# Altium PCB Switch.PcbDoc
Units mil, origin at the board's own origin, x right, y up, seen from the top; angles counter-clockwise.
Board outline 3375.03 x 2130.03 mil, 4 copper layers (Top Layer, GND, PWR, Bottom Layer), stack 30.634 mil thick; 89 components, 94 nets, 442 pads, 0 vias.
Unrouted connection lines stored in the file: 230.
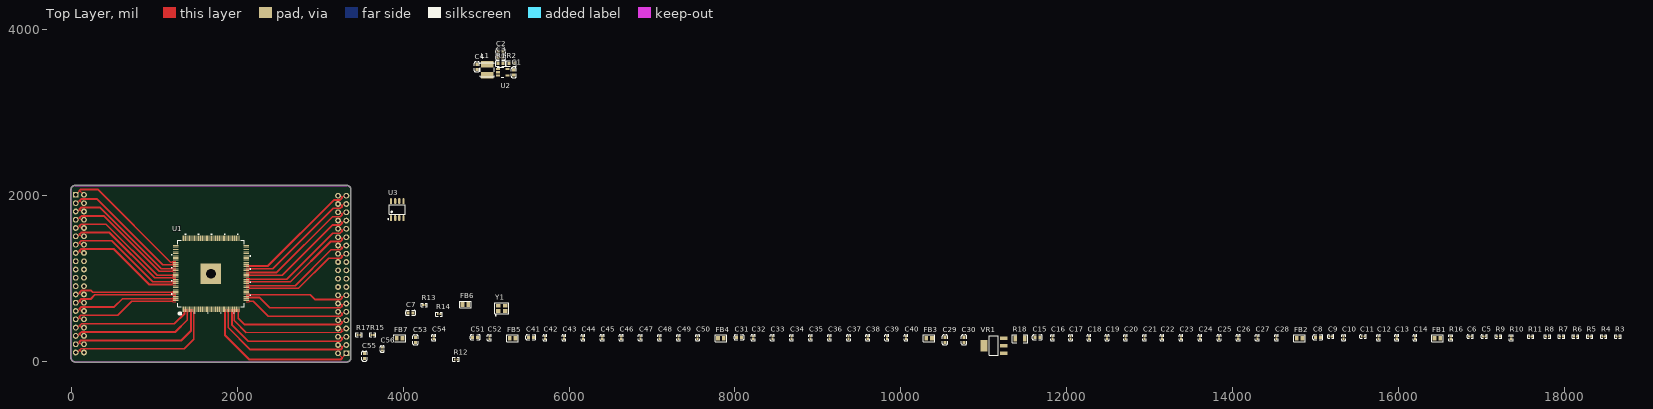
[diagram p0: Top Layer view]
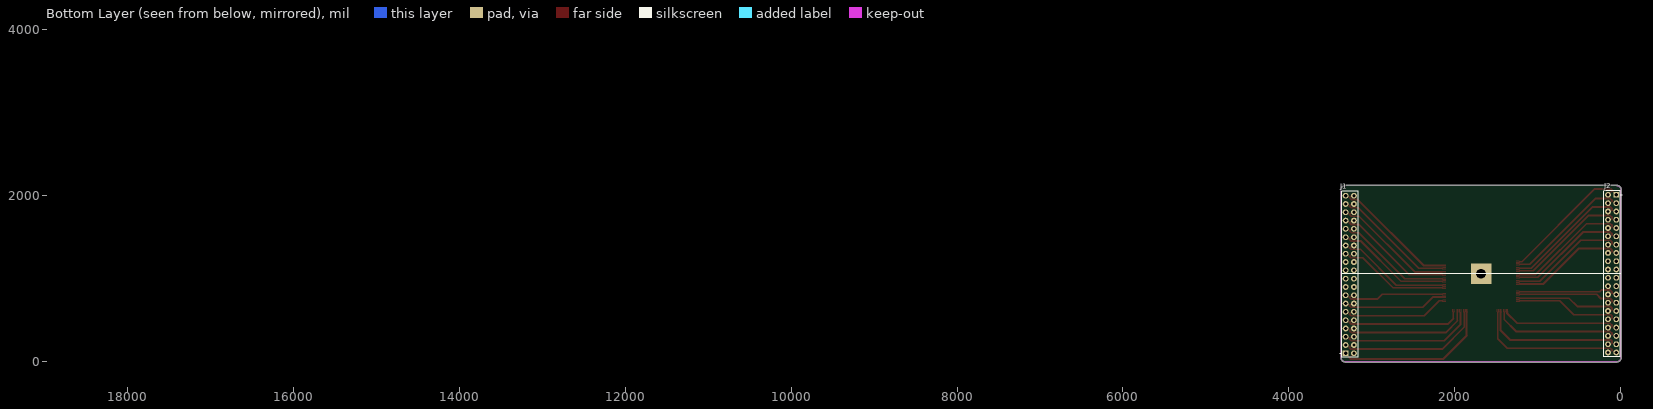
[diagram p1: Bottom Layer view, seen from below]
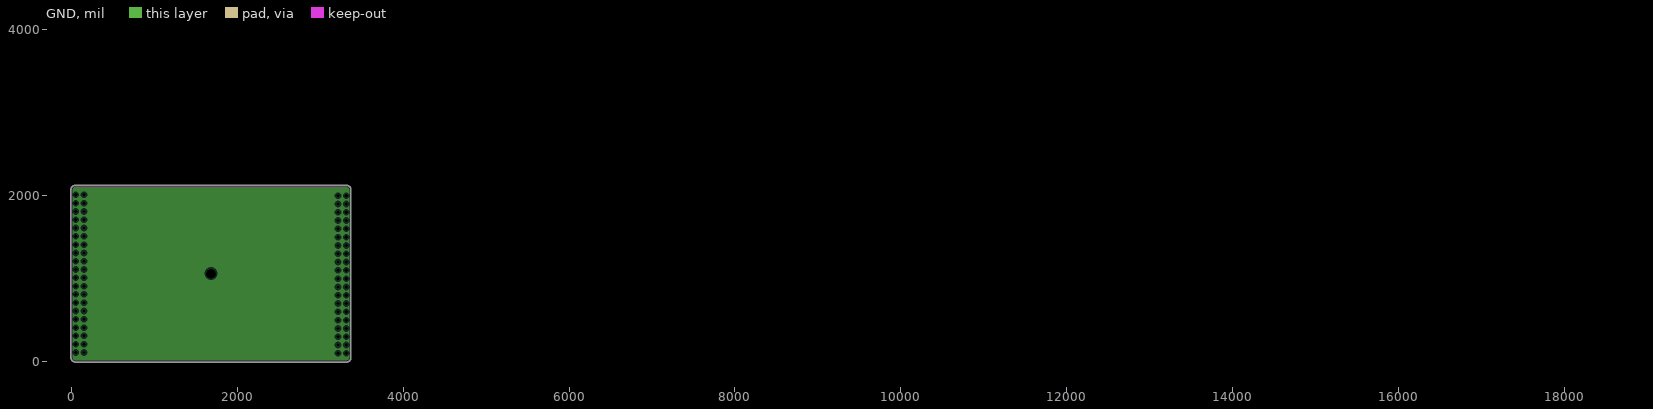
[diagram p2: GND, clearances drawn from the general rule]
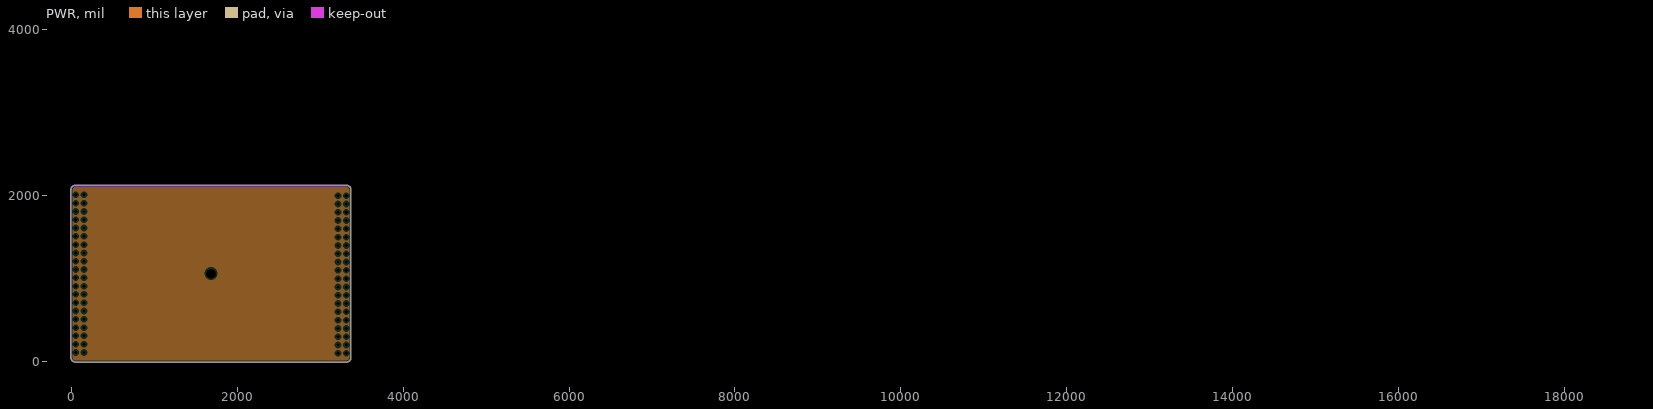
[diagram p3: PWR, clearances drawn from the general rule]

## Layer stack, top to bottom
Top Solder: solder mask 0.4, Solder Resist, Dk 3.5
Top Layer: signal copper 1.4
Dielectric 1: core 10, FR-4, Dk 4.2
GND: plane copper 1.417
Dielectric 3: prepreg 5, Dk 4.2
PWR: plane copper 1.417
Dielectric 2: core 10, Dk 4.2
Bottom Layer: signal copper 1.4
Bottom Solder: solder mask 0.4, Solder Resist, Dk 3.5

## Board outline
50,-2.51 cw(c50,50) -2.51,50 -2.51,2075 cw(c50,2075) 50,2127.51 3320,2127.51 cw(c3320,2075) 3372.52,2075 3372.52,50 cw(c3320,50) 3320,-2.51

## Design rules (kind name [scope] priority, off if disabled: settings)
Clearance [All] p1: gap=3.5 ignorepadtopadclearanceinfootprint=FALSE
DiffPairsRouting 100 [InDifferentialPairClass('All Differential Pairs')] p1: maxlimit=4 minlimit=4 mostfreqgap=4 toplayer_minwidth=4.96 toplayer_maxwidth=4.96 toplayer_prefwidth=4.96 bottomlayer_minwidth=4.96 bottomlayer_maxwidth=4.96 bottomlayer_prefwidth=4.96 maxuncoupledlength=500
PlaneClearance [All] p1: clearance=20
PlaneConnect [All] p1: planeconnectstyle=Relief reliefexpansion=20 reliefentries=4 reliefconductorwidth=10 reliefairgap=10
PolygonConnect [All] p1: connectstyle=Relief reliefconductorwidth=10 reliefentries=4 polygonreliefangle="90 Angle" airgapwidth=10
RoutingVias [All] p1: holewidth=28 width=50 viastyle="Through Hole" minholewidth=10 minwidth=20 maxholewidth=50 maxwidth=200
SolderMaskExpansion [All] p1: expansion=4
Width [All] p1: maxlimit=200 minlimit=4 preferedwidth=10
27 further rules are at their usual default settings.

## Classes and differential pairs
differential pair P7D: +P7D_P -P7D_N
differential pair P7C: +P7C_P -P7C_N
differential pair P7B: +P7B_P -P7B_N
differential pair P7A: +P7A_P -P7A_N
differential pair P6D: +P6D_P -P6D_N
differential pair P6C: +P6C_P -P6C_N
differential pair P6B: +P6B_P -P6B_N
differential pair P6A: +P6A_P -P6A_N
differential pair P5D: +P5D_P -P5D_N
differential pair P5C: +P5C_P -P5C_N
differential pair P5B: +P5B_P -P5B_N
differential pair P5A: +P5A_P -P5A_N
differential pair P4D: +P4D_P -P4D_N
differential pair P4C: +P4C_P -P4C_N
differential pair P4B: +P4B_P -P4B_N
differential pair P4A: +P4A_P -P4A_N
differential pair P3D: +P3D_P -P3D_N
differential pair P3C: +P3C_P -P3C_N
differential pair P3B: +P3B_P -P3B_N
differential pair P3A: +P3A_P -P3A_N
differential pair P2D: +P2D_P -P2D_N
differential pair P2C: +P2C_P -P2C_N
differential pair P2B: +P2B_P -P2B_N
differential pair P2A: +P2A_P -P2A_N
differential pair P1D: +P1D_P -P1D_N
differential pair P1C: +P1C_P -P1C_N
differential pair P1B: +P1B_P -P1B_N
differential pair P1A: +P1A_P -P1A_N
differential pair P0D: +P0D_P -P0D_N
differential pair P0C: +P0C_P -P0C_N
differential pair P0B: +P0B_P -P0B_N
differential pair P0A: +P0A_P -P0A_N

## Components (designator, comment, footprint, x,y, rotation, side; value= is the part's Value field where it differs from the comment)
C1 "4.7uF (475) 10% 16V" 0603_C 5335,3485 r270 top
C2 "22uF (226) 20% 6.3V" 0603_C 5175,3740 r180 top
C3 "22uF (226) 20% 6.3V" 0603_C 5175,3670 r180 top
C4 "22uF (226) 20% 6.3V" 0603_C 4890,3555 r90 top
C5 "33pF (330) 5% 50V" 0402_C 17030,305 r0 top
C6 "33pF (330) 5% 50V" 0402_C 16860,305 r0 top
C7 "1uF (105) 10% 50V" 0603_C 4090,590 r0 top
C8 "1uF (105) 10% 50V" 0603_C 15025,295 r0 top
C9 "100nF (104) 10% 16V" 0402_C 15180,305 r0 top
C10 "100nF (104) 10% 16V" 0402_C 15335,290 r90 top
C11 "100nF (104) 10% 16V" 0402_C 15570,305 r0 top
C12 "100nF (104) 10% 16V" 0402_C 15755,290 r90 top
C13 "100nF (104) 10% 16V" 0402_C 15975,290 r90 top
C14 "100nF (104) 10% 16V" 0402_C 16195,290 r90 top
C15 "1uF (105) 10% 50V" 0603_C 11645,295 r0 top
C16 "100nF (104) 10% 16V" 0402_C 11825,290 r90 top
C17 "100nF (104) 10% 16V" 0402_C 12045,290 r90 top
C18 "100nF (104) 10% 16V" 0402_C 12265,290 r90 top
C19 "100nF (104) 10% 16V" 0402_C 12485,290 r90 top
C20 "100nF (104) 10% 16V" 0402_C 12705,290 r90 top
C21 "100nF (104) 10% 16V" 0402_C 12935,290 r90 top
C22 "100nF (104) 10% 16V" 0402_C 13145,290 r90 top
C23 "100nF (104) 10% 16V" 0402_C 13375,290 r90 top
C24 "100nF (104) 10% 16V" 0402_C 13605,290 r90 top
C25 "100nF (104) 10% 16V" 0402_C 13835,290 r90 top
C26 "100nF (104) 10% 16V" 0402_C 14065,290 r90 top
C27 "100nF (104) 10% 16V" 0402_C 14295,290 r90 top
C28 "100nF (104) 10% 16V" 0402_C 14525,290 r90 top
C29 "1uF (105) 10% 50V" 0603_C 10530,265 r90 top
C30 "1uF (105) 10% 50V" 0603_C 10760,265 r90 top
C31 "1uF (105) 10% 50V" 0603_C 8050,295 r0 top
C32 "100nF (104) 10% 16V" 0402_C 8220,290 r90 top
C33 "100nF (104) 10% 16V" 0402_C 8450,290 r90 top
C34 "100nF (104) 10% 16V" 0402_C 8680,290 r90 top
C35 "100nF (104) 10% 16V" 0402_C 8910,290 r90 top
C36 "100nF (104) 10% 16V" 0402_C 9140,290 r90 top
C37 "100nF (104) 10% 16V" 0402_C 9370,290 r90 top
C38 "100nF (104) 10% 16V" 0402_C 9600,290 r90 top
C39 "100nF (104) 10% 16V" 0402_C 9830,290 r90 top
C40 "100nF (104) 10% 16V" 0402_C 10060,290 r90 top
C41 "1uF (105) 10% 50V" 0603_C 5540,295 r0 top
C42 "100nF (104) 10% 16V" 0402_C 5710,290 r90 top
C43 "100nF (104) 10% 16V" 0402_C 5940,290 r90 top
C44 "100nF (104) 10% 16V" 0402_C 6170,290 r90 top
C45 "100nF (104) 10% 16V" 0402_C 6400,290 r90 top
C46 "100nF (104) 10% 16V" 0402_C 6630,290 r90 top
C47 "100nF (104) 10% 16V" 0402_C 6860,290 r90 top
C48 "100nF (104) 10% 16V" 0402_C 7090,290 r90 top
C49 "100nF (104) 10% 16V" 0402_C 7320,290 r90 top
C50 "100nF (104) 10% 16V" 0402_C 7550,290 r90 top
C51 "1uF (105) 10% 50V" 0603_C 4870,295 r0 top
C52 "100nF (104) 10% 16V" 0402_C 5040,290 r90 top
C53 "1uF (105) 10% 50V" 0603_C 4150,265 r90 top
C54 "100nF (104) 10% 16V" 0402_C 4370,290 r90 top
C55 "1uF (105) 10% 50V" 0603_C 3535,70 r90 top
C56 "100nF (104) 10% 16V" 0402_C 3750,155 r90 top
FB1 "100Ω ±25% 100MHz" 0805_L 16465,285 r0 top
FB2 "100Ω ±25% 100MHz" 0805_L 14805,285 r0 top
FB3 "100Ω ±25% 100MHz" 0805_L 10340,285 r0 top
FB4 "100Ω ±25% 100MHz" 0805_L 7830,285 r0 top
FB5 "100Ω ±25% 100MHz" 0805_L 5320,285 r0 top
FB6 "100Ω ±25% 100MHz" 0805_L 4750,690 r0 top
FB7 "100Ω ±25% 100MHz" 0805_L 3960,285 r0 top
J1 "Header20x2_2.54_female" 2-534206-0 3317,102.5 r270 bottom locked
J2 "Header20x2_2.54_female" 2-534206-0 55,2012.5 r90 bottom locked
L1 "XAL4020-222MEB" XAL4020 5015,3520 r90 top value=2.2uH
R1 "66.5KΩ ±1%" 0603_R 5175,3595 r180 top
R2 "100KΩ (1003) ±1%" 0603_R 5305,3595 r180 top
R3 "4.7KΩ (4701) ±1%(NC)" 0402_R 18640,305 r0 top
R4 "4.7KΩ (4701) ±1%" 0402_R 18470,305 r0 top
R5 "4.7KΩ (4701) ±1%" 0402_R 18300,305 r0 top
R6 "4.7KΩ (4701) ±1%" 0402_R 18130,305 r0 top
R7 "4.7KΩ (4701) ±1%" 0402_R 17960,305 r0 top
R8 "4.7KΩ (4701) ±1%" 0402_R 17790,305 r0 top
R9 "4.7KΩ (4701) ±1%" 0402_R 17200,305 r0 top
R10 "4.7KΩ (4701) ±1%" 0402_R 17355,290 r90 top
R11 "4.7KΩ (4701) ±1%" 0402_R 17590,305 r0 top
R12 "100KΩ (1003) ±1%" 0402_R 4640,30 r0 top
R13 "4.7KΩ (4701) ±1%" 0402_R 4255,685 r0 top
R14 "4.7KΩ (4701) ±1%" 0402_R 4435,575 r0 top
R15 "4.7KΩ (4701) ±1%" 0402_R 3635,325 r0 top
R16 "1KΩ (1001) ±1%" 0402_R 16625,290 r90 top
R17 "2.49KΩ ±1%" 0402_R 3470,325 r0 top
R18 "0Ω (0R0) ±1%(NC)" 1206_R 11435,280 r0 top
U1 "RTL8370M" PLQP0176LA-B-M 1685,1062.5 r90 top locked
U2 "TLV62569DBVR" DBV0005A_M 5200,3490 r0 top value=N/A
U3 "M24C02-WMN6TP(NC)" SOIC-8_150mil 3930,1835 r0 top
VR1 "AMS1117-3.3" SOT-223 11120,195 r0 top
Y1 "25MHZ 12PF 10PPM" SMD-3225_4P 5190,645 r0 top

## Footprints (in the part's own frame and the unit in brackets; to place one, negate y for a bottom-side part, rotate by r counter-clockwise, add the part's x,y. Pads: shape width x height; smd on the part's side, far side on the other; paste and mask are expansions set on the pad)
2-534206-0 [mil]
  rect 70x70 hole 40.16: 1(0,0)
  round 70 hole 40.16: 2(0,100) 3(-100,0) 4(-100,100) 5(-200,0) 6(-200,100) 7(-300,0) 8(-300,100) 9(-400,0) 10(-400,100) 11(-500,0) 12(-500,100) 13(-600,0) 14(-600,100) 15(-700,0) 16(-700,100) 17(-800,0) 18(-800,100) 19(-900,0) 20(-900,100) 21(-1000,0) 22(-1000,100) 23(-1100,0) 24(-1100,100) 25(-1200,0) 26(-1200,100) 27(-1300,0) 28(-1300,100) 29(-1400,0) 30(-1400,100) 31(-1500,0) 32(-1500,100) 33(-1600,0) 34(-1600,100) 35(-1700,0) 36(-1700,100) 37(-1800,0) 38(-1800,100) 39(-1900,0) 40(-1900,100)
  silkscreen extent -1952,-67 48,152, body extent -1952,-46 48,152, height 320
0402_C [mm]
  rect 0.6x0.65 smd mask+0.051: 1(-0.425,0) 2(0.425,0)
  silkscreen extent -0.97,-0.58 0.97,0.58, body extent -0.48,-0.3 0.52,0.3, height 0.2
0402_R [mm]
  rect 0.6x0.65 smd mask+0.051: 1(-0.425,0) 2(0.425,0)
  silkscreen extent -0.97,-0.58 0.97,0.58, body extent -0.57,-0.27 0.58,0.28, height 0.41
0603_C [mm]
  rect 0.93x0.98 smd: 1(-0.77,0) 2(0.77,0)
  silkscreen extent -1.53,-0.79 1.54,0.79, body extent -0.8,-0.4 0.8,0.4, height 0.3
0603_R [mm]
  rect 0.93x0.98 smd: 1(-0.77,0) 2(0.77,0)
  silkscreen extent -1.53,-0.79 1.54,0.79, body extent -0.85,-0.4 0.85,0.4, height 0.56
0805_L [mm]
  rect 1.16x1.47 smd: 1(-0.89,0) 2(0.89,0)
  silkscreen extent -1.77,-1.04 1.77,1.03, body extent -1.02,-0.64 1.03,0.64, height 0.6
1206_R [mm]
  rect 1.13x1.8 smd: 1(-1.49,0) 2(1.49,0)
  silkscreen extent -2.36,-1.2 2.35,1.2, body extent -1.7,-0.86 1.65,0.87, height 0.85
DBV0005A_M [mm]
  rect 1.2x0.65 smd paste+0 mask+0.051: 1(-1.475,0.95) 2(-1.475,0) 3(-1.475,-0.95) 4(1.475,-0.95) 5(1.475,0.95)
  silkscreen extent -1.63,-1.55 0.38,1.55, body extent -1.4,-1.45 1.4,1.45, height 1.2
PLQP0176LA-B-M [mil]
  rect 66x9 smd paste+0 mask+0: 1(-426,338.58) 2(-426,322.83) 3(-426,307.09) 4(-426,291.34) 5(-426,275.59) 6(-426,259.84) 7(-426,244.09) 8(-426,228.35) 9(-426,212.6) 10(-426,196.85) 11(-426,181.1) 12(-426,165.35) 13(-426,149.61) 14(-426,133.86) 15(-426,118.11) 16(-426,102.36) 17(-426,86.61) 18(-426,70.87) 19(-426,55.12) 20(-426,39.37) 21(-426,23.62) 22(-426,7.87) 23(-426,-7.87) 24(-426,-23.62) 25(-426,-39.37) 26(-426,-55.12) 27(-426,-70.87) 28(-426,-86.61) 29(-426,-102.36) 30(-426,-118.11) 31(-426,-133.86) 32(-426,-149.61) 33(-426,-165.35) 34(-426,-181.1) 35(-426,-196.85) 36(-426,-212.6) 37(-426,-228.35) 38(-426,-244.09) 39(-426,-259.84) 40(-426,-275.59) 41(-426,-291.34) 42(-426,-307.09) 43(-426,-322.83) 44(-426,-338.58) 89(426,-338.58) 90(426,-322.83) 91(426,-307.09) 92(426,-291.34) 93(426,-275.59) 94(426,-259.84) 95(426,-244.09) 96(426,-228.35) 97(426,-212.6) 98(426,-196.85) 99(426,-181.1) 100(426,-165.35) 101(426,-149.61) 102(426,-133.86) 103(426,-118.11) 104(426,-102.36) 105(426,-86.61) 106(426,-70.87) 107(426,-55.12) 108(426,-39.37) 109(426,-23.62) 110(426,-7.87) 111(426,7.87) 112(426,23.62) 113(426,39.37) 114(426,55.12) 115(426,70.87) 116(426,86.61) 117(426,102.36) 118(426,118.11) 119(426,133.86) 120(426,149.61) 121(426,165.35) 122(426,181.1) 123(426,196.85) 124(426,212.6) 125(426,228.35) 126(426,244.09) 127(426,259.84) 128(426,275.59) 129(426,291.34) 130(426,307.09) 131(426,322.83) 132(426,338.58)
  rect 9x66 smd paste+0 mask+0: 45(-338.58,-426) 46(-322.83,-426) 47(-307.09,-426) 48(-291.34,-426) 49(-275.59,-426) 50(-259.84,-426) 51(-244.09,-426) 52(-228.35,-426) 53(-212.6,-426) 54(-196.85,-426) 55(-181.1,-426) 56(-165.35,-426) 57(-149.61,-426) 58(-133.86,-426) 59(-118.11,-426) 60(-102.36,-426) 61(-86.61,-426) 62(-70.87,-426) 63(-55.12,-426) 64(-39.37,-426) 65(-23.62,-426) 66(-7.87,-426) 67(7.87,-426) 68(23.62,-426) 69(39.37,-426) 70(55.12,-426) 71(70.87,-426) 72(86.61,-426) 73(102.36,-426) 74(118.11,-426) 75(133.86,-426) 76(149.61,-426) 77(165.35,-426) 78(181.1,-426) 79(196.85,-426) 80(212.6,-426) 81(228.35,-426) 82(244.09,-426) 83(259.84,-426) 84(275.59,-426) 85(291.34,-426) 86(307.09,-426) 87(322.83,-426) 88(338.58,-426) 133(338.58,426) 134(322.83,426) 135(307.09,426) 136(291.34,426) 137(275.59,426) 138(259.84,426) 139(244.09,426) 140(228.35,426) 141(212.6,426) 142(196.85,426) 143(181.1,426) 144(165.35,426) 145(149.61,426) 146(133.86,426) 147(118.11,426) 148(102.36,426) 149(86.61,426) 150(70.87,426) 151(55.12,426) 152(39.37,426) 153(23.62,426) 154(7.87,426) 155(-7.87,426) 156(-23.62,426) 157(-39.37,426) 158(-55.12,426) 159(-70.87,426) 160(-86.61,426) 161(-102.36,426) 162(-118.11,426) 163(-133.86,426) 164(-149.61,426) 165(-165.35,426) 166(-181.1,426) 167(-196.85,426) 168(-212.6,426) 169(-228.35,426) 170(-244.09,426) 171(-259.84,426) 172(-275.59,426) 173(-291.34,426) 174(-307.09,426) 175(-322.83,426) 176(-338.58,426)
  rect 248.03x248.03 hole 118.11: 177(0,0)
  silkscreen extent -491,-479 479,479, body extent -437,-437 437,437, height 67
SMD-3225_4P [mm]
  rect 1.4x1.15 smd: 1(-1.1,-0.8) 2(1.1,-0.8) 3(1.1,0.8) 4(-1.1,0.8)
  silkscreen extent -2.1,-2.35 2.1,1.7, body extent -1.6,-1.25 1.6,1.25, height 0.61
SOIC-8_150mil [mm]
  oval 0.7x1.8 smd: 1(-1.905,-2.6) 2(-0.635,-2.6) 3(0.635,-2.6) 4(1.905,-2.6) 5(1.905,2.6) 6(0.635,2.6) 7(-0.635,2.6) 8(-1.905,2.6)
  silkscreen extent -2.9,-3.05 2.4,1.4
SOT-223 [mm]
  rect 2.2x1 smd: 1(3,-2.3) 2(3,0) 3(3,2.3)
  rect 2.2x3.5 smd: 2(-3,0)
  silkscreen extent -1.4,-3 1.4,3, body extent -3.49,-3.24 3.49,3.24, height 1.64
XAL4020 [mm]
  rect 2x3.708 smd: 1(-1.7,0) 2(1.7,0)
  silkscreen extent -2.15,-2.15 2.15,2.15, body extent -2.45,-2.15 2.45,2.15, height 2.41

## Part data
C1: library part "0603 4.7uF (475) 10% 16V", "贴片电容", Package=0603, SuppliersPartNumber=C19666, ComponentLink1Description=供应商链接, ComponentLink1URL=http://www.szlcsc.com/product/details_20375.html, Supplier=LC
C2 C3 C4: library part "0603 22uF (226) 20% 6.3V", "贴片电容", Package=0603, SuppliersPartNumber=C59461, ComponentLink1Description=供应商链接, ComponentLink1URL=http://www.szlcsc.com/product/details_60514.html, Supplier=LC
C5 C6: library part "0402 33pF (330) 5% 50V", "贴片电容", Package=0402, SuppliersPartNumber=C1562, ComponentLink1Description=供应商链接, ComponentLink1URL=http://www.szlcsc.com/product/details_1914.html, Supplier=LC
C7 C8 C15 C29 C30 C31 C41 C51 C53 C55: library part "0603 1uF (105) 10% 50V", "贴片电容", Package=0603, SuppliersPartNumber=C15849, ComponentLink1Description=供应商链接, ComponentLink1URL=http://www.szlcsc.com/product/details_16531.html, Supplier=LC
C9 C10 C11 C12 C13 C14 C16 C17 C18 C19 C20 C21 C22 C23 C24 C25 C26 C27 C28 C32 C33 C34 C35 C36 C37 C38 C39 C40 C42 C43 C44 C45 C46 C47 C48 C49 C50 C52 C54 C56: library part "0402 100nF (104) 10% 16V", "贴片电容", Package=0402, SuppliersPartNumber=C1525, ComponentLink1Description=供应商链接, ComponentLink1URL=http://www.szlcsc.com/product/details_1877.html, Supplier=LC
FB1 FB2 FB3 FB4 FB5 FB6 FB7: library part "0805 100Ω 25% 100MHz", "贴片磁珠", Package=0805, SuppliersPartNumber=C1015, ComponentLink1Description=供应商链接, ComponentLink1URL=http://www.szlcsc.com/product/details_1367.html, Supplier=LC
L1: Manufacturer Name=Coilcraft, Manufacturer Part Number=XAL4020-222MEB, PackageReference=XAL4020-222MEB
R1 R2: library part "0603 100KΩ (1003) 1%", "贴片电阻", Package=0603, SuppliersPartNumber=C25803, ComponentLink1Description=供应商链接, Supplier=LC
  R2: ComponentLink1URL=http://www.szlcsc.com/product/details_26546.html
R3 R4 R5 R6 R7 R8 R9 R10 R11 R13 R14 R15: library part "0402 4.7KΩ (4701) 1%", "贴片电阻", Package=0402, SuppliersPartNumber=C25900, ComponentLink1Description=供应商链接, ComponentLink1URL=http://www.szlcsc.com/product/details_26643.html, Supplier=LC
R12: library part "0402 100KΩ (1003) 1%", "贴片电阻", Package=0402, SuppliersPartNumber=C25741, ComponentLink1Description=供应商链接, ComponentLink1URL=http://www.szlcsc.com/product/details_26484.html, Supplier=LC
R16: library part "0402 1KΩ (1001) 1%", "贴片电阻", Package=0402, SuppliersPartNumber=C11702, ComponentLink1Description=供应商链接, ComponentLink1URL=http://www.szlcsc.com/product/details_12256.html, Supplier=LC
R17: library part "0402 2KΩ (2001) 1%", "贴片电阻", Package=0402, SuppliersPartNumber=C4109, ComponentLink1Description=供应商链接, ComponentLink1URL=http://www.szlcsc.com/product/details_4516.html, Supplier=LC
R18: library part "1206 0Ω (0R0) 1%", "贴片电阻", Package=1206, SuppliersPartNumber=C17888, ComponentLink1Description=供应商链接, ComponentLink1URL=http://www.szlcsc.com/product/details_18576.html, Supplier=LC
U2: Manufacturer Name="Texas Instruments", Manufacturer Part Number=TLV62569DBVR, PackageReference=TLV62569DBVR
U3: library part M24C02-WMN6TP_[C7562], "EEPROM", Package=SOIC-8_150mil, SuppliersPartNumber=C7562, ComponentLink1Description=供应商链接, ComponentLink1URL=http://www.szlcsc.com/product/details_8039.html, Supplier=LC
VR1: library part "SOT-223 AMS1117-3.3", "低压差线性稳压(LDO)", Package=SOT-223, SuppliersPartNumber=C6186, ComponentLink1Description=供应商链接, ComponentLink1URL=http://www.szlcsc.com/product/details_6652.html, Supplier=LC
Y1: library part "SMD-3225_4P  25MHZ 12PF 10PPM", "贴片晶振", Package=SMD-3225_4P, SuppliersPartNumber=C9006, ComponentLink1Description=供应商链接, ComponentLink1URL=http://www.szlcsc.com/product/details_9526.html, Supplier=LC

## Nets (pads, with @x,y where several pads share a name; then routed paths per layer and width w, separated by ;. In a path a pad name is that pad's centre, name@x,y a point inside that pad or via, vN(x,y) a via of type N, cw(c..) or ccw(c..) an arc to the next point about the centre after c; other vN are vias at no path point)
1V: C2.2 C3.2 C4.2 FB3.1 FB4.1 FB5.1 FB6.1 FB7.1 L1.2 R1.2
3V3: C30.2 FB1.1 FB2.1 R4.1 R5.1 R8.1 R9.1 R12.2 R13.2 R14.1 R15.1 R18.2 U3.8 VR1.2
AVDDH: C15.2 C16.2 C17.2 C18.2 C19.2 C20.2 C21.2 C22.2 C23.2 C24.2 C25.2 C26.2 C27.2 C28.2 FB2.2 U1.1 U1.11 U1.20 U1.32 U1.42 U1.54 U1.64 U1.74 U1.137 U1.144 U1.154 U1.167
AVDDL: C31.2 C32.2 C33.2 C34.2 C35.2 C36.2 C37.2 C38.2 C39.2 C40.2 FB3.2 U1.6 U1.17 U1.37 U1.47 U1.59 U1.69 U1.149 U1.159 U1.172
DIS_8051: R5.2 U1.125
DISAUTOLOAD: R3.2 R4.2 U1.126
DVDDIO: C8.2 C9.2 C10.2 C11.2 C12.2 C13.2 C14.2 FB1.2 U1.21 U1.88 U1.104 U1.105 U1.132 U1.140
DVDDL: C41.2 C42.2 C43.2 C44.2 C45.2 C46.2 C47.2 C48.2 C49.2 C50.2 FB4.2 U1.22 U1.26 U1.29 U1.30 U1.103 U1.106 U1.133 U1.136
DVDDL1: C51.2 C52.2 FB5.2
EN_FLASH: R6.2 U1.124
EN_PHY: R7.2 U1.131
GND: C1.1 C2.1 C3.1 C4.1 C5.1 C6.1 C7.1 C8.1 C9.1 C10.1 C11.1 C12.1 C13.1 C14.1 C15.1 C16.1 C17.1 C18.1 C19.1 C20.1 C21.1 C22.1 C23.1 C24.1 C25.1 C26.1 C27.1 C28.1 C29.1 C30.1 C31.1 C32.1 C33.1 C34.1 C35.1 C36.1 C37.1 C38.1 C39.1 C40.1 C41.1 C42.1 C43.1 C44.1 C45.1 C46.1 C47.1 C48.1 C49.1 C50.1 C51.1 C52.1 C53.1 C54.1 C55.1 C56.1 J1.17 J1.19 J1.21 J1.23 J2.17 J2.19 J2.21 J2.23 R2.1 R3.1 R6.1 R7.1 R10.1 R11.1 R16.1 R17.1 U1.12 U1.15 U1.23 U1.28 U1.31 U1.53 U1.166 U1.177 U2.2 U3.1 U3.2 U3.3 U3.4 VR1.1
INT: U1.24
NetC5_2: C5.2 U1.138 Y1.3
NetC6_2: C6.2 U1.139 Y1.1
NetL1_1: L1.1 U2.3
NetR1_1: R1.1 R2.2 U2.5
NetR9_2: R9.2 U1.123
NetR10_2: R10.2 U1.120
NetR11_2: R11.2 U1.91
NetR13_1: R13.1 U1.142 U3.6
NetR14_2: R14.2 U1.143 U3.5
NetR15_2: R15.2 U3.7
NetR16_2: R16.2 U1.13
NetR17_2: R17.2 U1.16
nRST: C7.2 R12.1 U1.141
P0A_N: J2.2 U1.146 | length 1588.1
  Top Layer w4.96: J2.2 109.48,2058.02 109.48,2065 118.48,2074 318.04,2074 1192.29,1199.75 1220.13,1199.75 1223.52,1196.36 U1.146
P0A_P: J2.1 U1.145 | length 1603
  Top Layer w4.96: J2.1 100.52,2058.02 100.52,2068.71 114.77,2082.96 321.75,2082.96 327.71,2077 1196,1208.71 1220.13,1208.71 1223.52,1212.11 U1.145
P0B_N: J2.4 U1.148 | length 1550.5
  Top Layer w4.96: J2.4 129.98,1912.5 109.48,1933 109.48,1942.48 128,1961 306.33,1961 1099.07,1168.26 1220.13,1168.26 1223.52,1164.86 U1.148
P0B_P: J2.3 U1.147 | length 1565.3
  Top Layer w4.96: J2.3 80.02,1912.5 100.52,1933 100.52,1946.19 121.66,1967.34 124.29,1969.96 310.04,1969.96 1102.78,1177.22 1220.13,1177.22 1223.52,1180.61 U1.147
P0C_N: J2.6 U1.151 | length 1528.2
  Top Layer w4.96: J2.6 122.98,1812.5 109.48,1826 109.48,1839 128.48,1858 343.33,1858 1080.32,1121.01 1220.13,1121.01 1223.52,1117.62 U1.151
P0C_P: J2.5 U1.150 | length 1543
  Top Layer w4.96: J2.5 87.02,1812.5 100.52,1826 100.52,1842.71 124.77,1866.96 347.04,1866.96 1084.03,1129.97 1220.13,1129.97 1223.52,1133.37 U1.150
P0D_N: J2.8 U1.153 | length 1498.7
  Top Layer w4.96: J2.8 120.98,1712.5 109.48,1724 109.48,1736.48 130,1757 391.33,1757 1058.81,1089.52 1220.13,1089.52 1223.52,1086.12 U1.153
P0D_P: J2.7 U1.152 | length 1513.5
  Top Layer w4.96: J2.7 89.02,1712.5 100.52,1724 100.52,1740.19 123.66,1763.34 126.29,1765.96 395.04,1765.96 1062.52,1098.48 1220.13,1098.48 1223.52,1101.87 U1.152
P1A_N: J2.10 U1.156 | length 1478.2
  Top Layer w4.96: J2.10 123.98,1612.5 109.48,1627 109.48,1640.48 127,1658 416,1658 1031.73,1042.27 1220.13,1042.27 1223.52,1038.88 U1.156
P1A_P: J2.9 U1.155 | length 1493.1
  Top Layer w4.96: J2.9 86.02,1612.5 100.52,1627 100.52,1644.19 123.29,1666.96 419.71,1666.96 1035.44,1051.23 1220.13,1051.23 1223.52,1054.63 U1.155
P1B_N: J2.12 U1.158 | length 1448.4
  Top Layer w4.96: J2.12 123.98,1512.5 109.48,1527 109.48,1539.48 127,1557 456.33,1557 1002.55,1010.78 1220.13,1010.78 1223.52,1007.38 U1.158
P1B_P: J2.11 U1.157 | length 1463.3
  Top Layer w4.96: J2.11 86.02,1512.5 100.52,1527 100.52,1543.19 120.66,1563.34 123.29,1565.96 460.04,1565.96 1006.26,1019.74 1220.13,1019.74 1223.52,1023.13 U1.157
P1C_N: J2.14 U1.161 | length 1429.8
  Top Layer w4.96: J2.14 120.98,1412.5 109.48,1424 109.48,1440.48 127,1458 485.33,1458 979.8,963.53 1220.13,963.53 1223.52,960.14 U1.161
P1C_P: J2.13 U1.160 | length 1444.6
  Top Layer w4.96: J2.13 89.02,1412.5 100.52,1424 100.52,1444.19 123.29,1466.96 489.04,1466.96 983.51,972.49 1220.13,972.49 1223.52,975.89 U1.160
P1D_N: J2.16 U1.163 | length 1398.5
  Top Layer w4.96: J2.16 124.98,1312.5 109.48,1328 109.48,1339.48 128,1358 510.33,1358 936.29,932.04 1220.13,932.04 1223.52,928.64 U1.163
P1D_P: J2.15 U1.162 | length 1413.3
  Top Layer w4.96: J2.15 85.02,1312.5 100.52,1328 100.52,1343.19 124.29,1366.96 514.04,1366.96 940,941 1220.13,941 1223.52,944.39 U1.162
P2A_N: J2.26 U1.169 | length 1230.2
  Top Layer w4.96: J2.26 119.98,812.5 109.48,823 109.48,835.48 131,857 235,857 254.45,837.55 1220.13,837.55 1223.52,834.15 U1.169
P2A_P: J2.25 U1.168 | length 1245.1
  Top Layer w4.96: J2.25 90.02,812.5 100.52,823 100.52,839.19 127.29,865.96 238.71,865.96 258.16,846.51 1220.13,846.51 1223.52,849.9 U1.168
P2B_N: J2.28 U1.171 | length 1241.6
  Top Layer w4.96: J2.28 123.98,712.5 109.48,727 109.48,738 128.48,757 240,757 289.05,806.05 1220.13,806.05 1223.52,802.66 U1.171
P2B_P: J2.27 U1.170 | length 1256.5
  Top Layer w4.96: J2.27 86.02,712.5 100.52,727 100.52,741.71 124.77,765.96 236.29,765.96 285.34,815.01 1220.13,815.01 1223.52,818.41 U1.170
P2C_N: J2.30 U1.174 | length 1264.4
  Top Layer w4.96: J2.30 123.98,612.5 109.48,627 109.48,639.48 128,658 522.67,658 623.48,758.81 1220.13,758.81 1223.52,755.41 U1.174
P2C_P: J2.29 U1.173 | length 1279.2
  Top Layer w4.96: J2.29 86.02,612.5 100.52,627 100.52,643.19 124.29,666.96 518.96,666.96 619.77,767.77 1220.13,767.77 1223.52,771.16 U1.173
P2D_N: J2.32 U1.176 | length 1298.9
  Top Layer w4.96: J2.32 121.98,512.5 109.48,525 109.48,548 120.48,559 568,559 736.31,727.31 1220.13,727.31 1223.52,723.92 U1.176
P2D_P: J2.31 U1.175 | length 1313.7
  Top Layer w4.96: J2.31 88.02,512.5 100.52,525 100.52,551.71 116.77,567.96 564.29,567.96 732.6,736.27 1220.13,736.27 1223.52,739.67 U1.175
P3A_N: J2.34 U1.3 | length 1442.6
  Top Layer w4.96: J2.34 122.98,412.5 109.48,426 109.48,436.48 130,457 1249.23,457 1374.52,582.29 1374.52,597.63 1377.91,601.02 U1.3
P3A_P: J2.33 U1.2 | length 1442.6
  Top Layer w4.96: J2.33 87.02,412.5 100.52,426 100.52,440.19 126.29,465.96 1245.52,465.96 1365.56,586 1365.56,597.63 1362.17,601.02 U1.2
P3B_N: J2.36 U1.5 | length 1560.6
  Top Layer w4.96: J2.36 124.98,312.5 109.48,328 109.48,339.48 129,359 1258.67,359 1406.02,506.34 1406.02,597.63 1409.41,601.02 U1.5
P3B_P: J2.35 U1.4 | length 1560.6
  Top Layer w4.96: J2.35 85.02,312.5 100.52,328 100.52,343.19 125.29,367.96 1254.96,367.96 1397.06,510.06 1397.06,597.63 1393.66,601.02 U1.4
P3C_N: J2.38 U1.8 | length 1728.5
  Top Layer w4.96: J2.38 123.98,212.5 109.48,227 109.48,244 122.48,257 1333.67,257 1453.26,376.59 1453.26,597.63 1456.65,601.02 U1.8
P3C_P: J2.37 U1.7 | length 1728.5
  Top Layer w4.96: J2.37 86.02,212.5 100.52,227 100.52,247.71 118.77,265.96 1329.96,265.96 1444.3,380.3 1444.3,597.63 1440.91,601.02 U1.7
P3D_N: J2.40 U1.10 | length 1856.5
  Top Layer w4.96: J2.40 131.98,112.5 109.48,135 109.48,141.48 125,157 1369.67,157 1484.76,272.08 1484.76,597.63 1488.15,601.02 U1.10
P3D_P: J2.39 U1.9 | length 1856.5
  Top Layer w4.96: J2.39 78.02,112.5 100.52,135 100.52,145.19 121.29,165.96 1365.96,165.96 1475.8,275.8 1475.8,597.63 1472.4,601.02 U1.9
P4A_N: J1.2 U1.34 | length 1911.5
  Top Layer w4.96: U1.34 1866.1,601.02 1862.71,597.63 1862.71,320.29 2146,37 3249.52,37 3262.52,50 3262.52,56.98 J1.2
P4A_P: J1.1 U1.33 | length 1941.2
  Top Layer w4.96: U1.33 1850.35,601.02 1853.75,597.63 1853.75,316.58 2142.29,28.04 3253.23,28.04 3271.48,46.29 3271.48,56.98 J1.1
P4B_N: J1.4 U1.36 | length 1770.9
  Top Layer w4.96: U1.36 1897.6,601.02 1894.2,597.63 1894.2,418 2155.2,157 3252,157 3262.52,167.52 3262.52,185 3245.02,202.5 J1.4
P4B_P: J1.3 U1.35 | length 1800.6
  Top Layer w4.96: U1.35 1881.85,601.02 1885.24,597.63 1885.24,414.29 2151.49,148.04 2155.2,148.04 2283.29,148.04 3255.71,148.04 3271.48,163.81 3271.48,185 3288.98,202.5 J1.3
P4C_N: J1.6 U1.39 | length 1661.8
  Top Layer w4.96: U1.39 1944.84,601.02 1941.45,597.63 1941.45,449.55 2134,257 3245.52,257 3262.52,274 3262.52,288 3248.02,302.5 J1.6
P4C_P: J1.5 U1.38 | length 1691.4
  Top Layer w4.96: U1.38 1929.09,601.02 1932.49,597.63 1932.49,445.84 2130.29,248.04 3249.23,248.04 3271.48,270.29 3271.48,288 3285.98,302.5 J1.5
P4D_N: J1.8 U1.41 | length 1560.5
  Top Layer w4.96: U1.41 1976.34,601.02 1972.94,597.63 1972.94,496 2110.94,358 3247,358 3262.52,373.52 3262.52,387 3247.02,402.5 J1.8
P4D_P: J1.7 U1.40 | length 1590.2
  Top Layer w4.96: U1.40 1960.59,601.02 1963.98,597.63 1963.98,492.29 2107.23,349.04 3250.71,349.04 3271.48,369.81 3271.48,387 3286.98,402.5 J1.7
P5A_N: J1.10 U1.44 | length 1453.4
  Top Layer w4.96: U1.44 2023.58,601.02 2020.19,597.63 2020.19,524.81 2088,457 3244,457 3262.52,475.52 3262.52,485 3245.02,502.5 J1.10
P5A_P: J1.9 U1.43 | length 1483.1
  Top Layer w4.96: U1.43 2007.83,601.02 2011.23,597.63 2011.23,521.1 2084.29,448.04 3247.71,448.04 3271.48,471.81 3271.48,485 3288.98,502.5 J1.9
P5B_N: J1.12 U1.46 | length 1299.8
  Top Layer w4.96: U1.46 2146.48,739.67 2149.87,736.27 2193.73,736.27 2373,557 3248.52,557 3262.52,571 3262.52,585 3245.02,602.5 J1.12
P5B_P: J1.11 U1.45 | length 1314.6
  Top Layer w4.96: U1.45 2146.48,723.92 2149.87,727.31 2190.02,727.31 2369.29,548.04 3252.23,548.04 3271.48,567.29 3271.48,585 3288.98,602.5 J1.11
P5C_N: J1.14 U1.49 | length 1276.8
  Top Layer w4.96: U1.49 2146.48,786.91 2149.87,783.52 2268.16,783.52 2393.67,658 3247,658 3262.52,673.52 3262.52,687 3247.02,702.5 J1.14
P5C_P: J1.13 U1.48 | length 1291.6
  Top Layer w4.96: U1.48 2146.48,771.16 2149.87,774.56 2264.44,774.56 2389.96,649.04 3250.71,649.04 3271.48,669.81 3271.48,687 3286.98,702.5 J1.13
P5D_N: J1.16 U1.51 | length 1247.3
  Top Layer w4.96: U1.51 2146.48,818.41 2149.87,815.01 2879.71,815.01 2936.76,757.96 3246.96,757.96 3262.52,773.52 3262.52,785 3245.02,802.5 J1.16
P5D_P: J1.15 U1.50 | length 1262.1
  Top Layer w4.96: U1.50 2146.48,802.66 2149.87,806.05 2876,806.05 2933.01,749.04 3250.71,749.04 3271.48,769.81 3271.48,785 3288.98,802.5 J1.15
P6A_N: J1.26 U1.56 | length 1373
  Top Layer w4.96: U1.56 2146.48,897.15 2149.87,893.75 2741.75,893.75 3105,1257 3249.52,1257 3262.52,1270 3262.52,1279 3239.02,1302.5 J1.26
P6A_P: J1.25 U1.55 | length 1387.9
  Top Layer w4.96: U1.55 2146.48,881.4 2149.87,884.79 2745.46,884.79 3108.71,1248.04 3253.23,1248.04 3271.48,1266.29 3271.48,1279 3294.98,1302.5 J1.25
P6B_N: J1.28 U1.58 | length 1400.5
  Top Layer w4.96: U1.58 2146.48,928.64 2149.87,925.25 2700.25,925.25 3132,1357 3244,1357 3262.52,1375.52 3262.52,1383 3243.02,1402.5 J1.28
P6B_P: J1.27 U1.57 | length 1415.4
  Top Layer w4.96: U1.57 2146.48,912.89 2149.87,916.29 2703.96,916.29 3135.71,1348.04 3247.71,1348.04 3271.48,1371.81 3271.48,1383 3290.98,1402.5 J1.27
P6C_N: J1.30 U1.61 | length 1426.2
  Top Layer w4.96: U1.61 2146.48,975.89 2149.87,972.49 2645.49,972.49 3130,1457 3246.52,1457 3262.52,1473 3262.52,1487 3247.02,1502.5 J1.30
P6C_P: J1.29 U1.60 | length 1441
  Top Layer w4.96: U1.60 2146.48,960.14 2149.87,963.53 2649.2,963.53 3133.71,1448.04 3250.23,1448.04 3271.48,1469.29 3271.48,1487 3286.98,1502.5 J1.29
P6D_N: J1.32 U1.63 | length 1451.3
  Top Layer w4.96: U1.63 2146.48,1007.38 2149.87,1003.99 2600.99,1003.99 3154,1557 3241,1557 3262.52,1578.52 3262.52,1587 3247.02,1602.5 J1.32
P6D_P: J1.31 U1.62 | length 1466.2
  Top Layer w4.96: U1.62 2146.48,991.63 2149.87,995.03 2604.7,995.03 3157.71,1548.04 3244.71,1548.04 3271.48,1574.81 3271.48,1587 3286.98,1602.5 J1.31
P7A_N: J1.34 U1.66 | length 1472
  Top Layer w4.96: U1.66 2146.48,1054.63 2149.87,1051.23 2544.23,1051.23 3151,1658 3244,1658 3262.52,1676.52 3262.52,1683 3243.02,1702.5 J1.34
P7A_P: J1.33 U1.65 | length 1486.9
  Top Layer w4.96: U1.65 2146.48,1038.88 2149.87,1042.27 2547.94,1042.27 3154.71,1649.04 3247.71,1649.04 3271.48,1672.81 3271.48,1683 3290.98,1702.5 J1.33
P7B_N: J1.36 U1.68 | length 1503.9
  Top Layer w4.96: U1.68 2146.48,1086.12 2149.87,1082.73 2476.73,1082.73 3151,1757 3246,1757 3262.52,1773.52 3262.52,1786 3246.02,1802.5 J1.36
P7B_P: J1.35 U1.67 | length 1518.7
  Top Layer w4.96: U1.67 2146.48,1070.37 2149.87,1073.77 2480.44,1073.77 3154.71,1748.04 3249.71,1748.04 3271.48,1769.81 3271.48,1786 3287.98,1802.5 J1.35
P7C_N: J1.38 U1.71 | length 1525.2
  Top Layer w4.96: U1.71 2146.48,1133.37 2149.87,1129.97 2431.97,1129.97 3160,1858 3246,1858 3262.52,1874.52 3262.52,1886 3246.02,1902.5 J1.38
P7C_P: J1.37 U1.70 | length 1540
  Top Layer w4.96: U1.70 2146.48,1117.62 2149.87,1121.01 2435.68,1121.01 3163.71,1849.04 3249.71,1849.04 3271.48,1870.81 3271.48,1886 3287.98,1902.5 J1.37
P7D_N: J1.40 U1.73 | length 1552.4
  Top Layer w4.96: U1.73 2146.48,1164.86 2149.87,1161.47 2372.47,1161.47 3168,1957 3241,1957 3262.52,1978.52 3262.52,1988 3248.02,2002.5 J1.40
P7D_P: J1.39 U1.72 | length 1567.2
  Top Layer w4.96: U1.72 2146.48,1149.11 2149.87,1152.51 2376.18,1152.51 3171.71,1948.04 3244.71,1948.04 3271.48,1974.81 3271.48,1988 3285.98,2002.5 J1.39
PLLVDDL0: C53.2 C54.2 FB6.2 U1.164
PLLVDDL1: C55.2 C56.2 FB7.2 U1.52
SMI_SEL: R8.2 U1.135
VCC: C1.2 C29.2 J1.18 J1.20 J1.22 J1.24 J2.18 J2.20 J2.22 J2.24 R18.1 U2.1 U2.4 VR1.3
pads on no net: U1.14 U1.18 U1.19 U1.25 U1.27 U1.75 U1.76 U1.77 U1.78 U1.79 U1.80 U1.81 U1.82 U1.83 U1.84 U1.85 U1.86 U1.87 U1.89 U1.90 U1.92 U1.93 U1.94 U1.95 U1.96 U1.97 U1.98 U1.99 U1.100 U1.101 U1.102 U1.107 U1.108 U1.109 U1.110 U1.111 U1.112 U1.113 U1.114 U1.115 U1.116 U1.117 U1.118 U1.119 U1.121 U1.122 U1.127 U1.128 U1.129 U1.130 U1.134 U1.165 Y1.2 Y1.4

## Polygon pours and split planes (outlines as drawn)
no net on GND (split plane): 3324.24,2107.21 3328.41,2106.38 3332.43,2105.01 3336.24,2103.13 3339.78,2100.77 3342.97,2097.97 3345.77,2094.78 3348.13,2091.24 3350.01,2087.43 3351.38,2083.41 3352.21,2079.24 3352.46,2075.4 3352.42,2075 3352.42,50 3352.46,49.6 3352.21,45.76 3351.38,41.59 3350.01,37.57 3348.13,33.76 3345.77,30.22 3342.97,27.03 3339.78,24.23 3336.24,21.87 3332.43,19.99 3328.41,18.62 3324.24,17.79 3320.4,17.54 3320,17.58 50,17.58 49.6,17.54 45.76,17.79 41.59,18.62 37.57,19.99 33.76,21.87 30.22,24.23 27.03,27.03 24.23,30.22 21.87,33.76 19.99,37.57 18.62,41.59 17.79,45.76 17.54,49.6 17.58,50 17.58,2075 17.54,2075.4 17.79,2079.24 18.62,2083.41 19.99,2087.43 21.87,2091.24 24.23,2094.78 27.03,2097.97 30.22,2100.77 33.76,2103.13 37.57,2105.01 41.59,2106.38 45.76,2107.21 49.6,2107.46 50,2107.42 3320,2107.42 3320.4,2107.46
no net on PWR (split plane): 3324.24,2107.21 3328.41,2106.38 3332.43,2105.01 3336.24,2103.13 3339.78,2100.77 3342.97,2097.97 3345.77,2094.78 3348.13,2091.24 3350.01,2087.43 3351.38,2083.41 3352.21,2079.24 3352.46,2075.4 3352.42,2075 3352.42,50 3352.46,49.6 3352.21,45.76 3351.38,41.59 3350.01,37.57 3348.13,33.76 3345.77,30.22 3342.97,27.03 3339.78,24.23 3336.24,21.87 3332.43,19.99 3328.41,18.62 3324.24,17.79 3320.4,17.54 3320,17.58 50,17.58 49.6,17.54 45.76,17.79 41.59,18.62 37.57,19.99 33.76,21.87 30.22,24.23 27.03,27.03 24.23,30.22 21.87,33.76 19.99,37.57 18.62,41.59 17.79,45.76 17.54,49.6 17.58,50 17.58,2075 17.54,2075.4 17.79,2079.24 18.62,2083.41 19.99,2087.43 21.87,2091.24 24.23,2094.78 27.03,2097.97 30.22,2100.77 33.76,2103.13 37.57,2105.01 41.59,2106.38 45.76,2107.21 49.6,2107.46 50,2107.42 3320,2107.42 3320.4,2107.46

## Keep-outs
Keep-Out Layer:
  lines w5: 135,2125 50,2125 ; 0,2075 cw(c50,2075) 50,2125 ; 0,2075 cw(c50,2075) 50,2125 ; 0,2075 0,50 ccw(c50,50) 50,0 3320,0 ccw(c3320,50) 3370,50 3370,2075 ccw(c3320,2075) 3320,2125 50,2125

## Silkscreen, mask and mechanical layers (free items; w line width, h text height)
Bottom Overlay:
  lines w5: 0,1062.5 3370,1062.5
Mechanical 13:
  lines w5: 135,2125 50,2125 ; 0,2075 cw(c50,2075) 50,2125 ; 0,2075 cw(c50,2075) 50,2125 ; 0,2075 0,50 ccw(c50,50) 50,0 3320,0 ccw(c3320,50) 3370,50 3370,2075 ccw(c3320,2075) 3320,2125 50,2125

## Text inside footprints (layer, text, board x,y; h text height)
U1: Mechanical 13 "*" at 1363.54,669.5 h50 r90